# Altium PCB CH32V317W-R0-1v0.PcbDoc
Units mil, origin at the board's own origin, x right, y up, seen from the top; angles counter-clockwise.
Board outline 2362.2 x 2874.02 mil, 2 copper layers (Top Layer, Bottom Layer); 50 components, 79 nets, 297 pads, 416 vias.
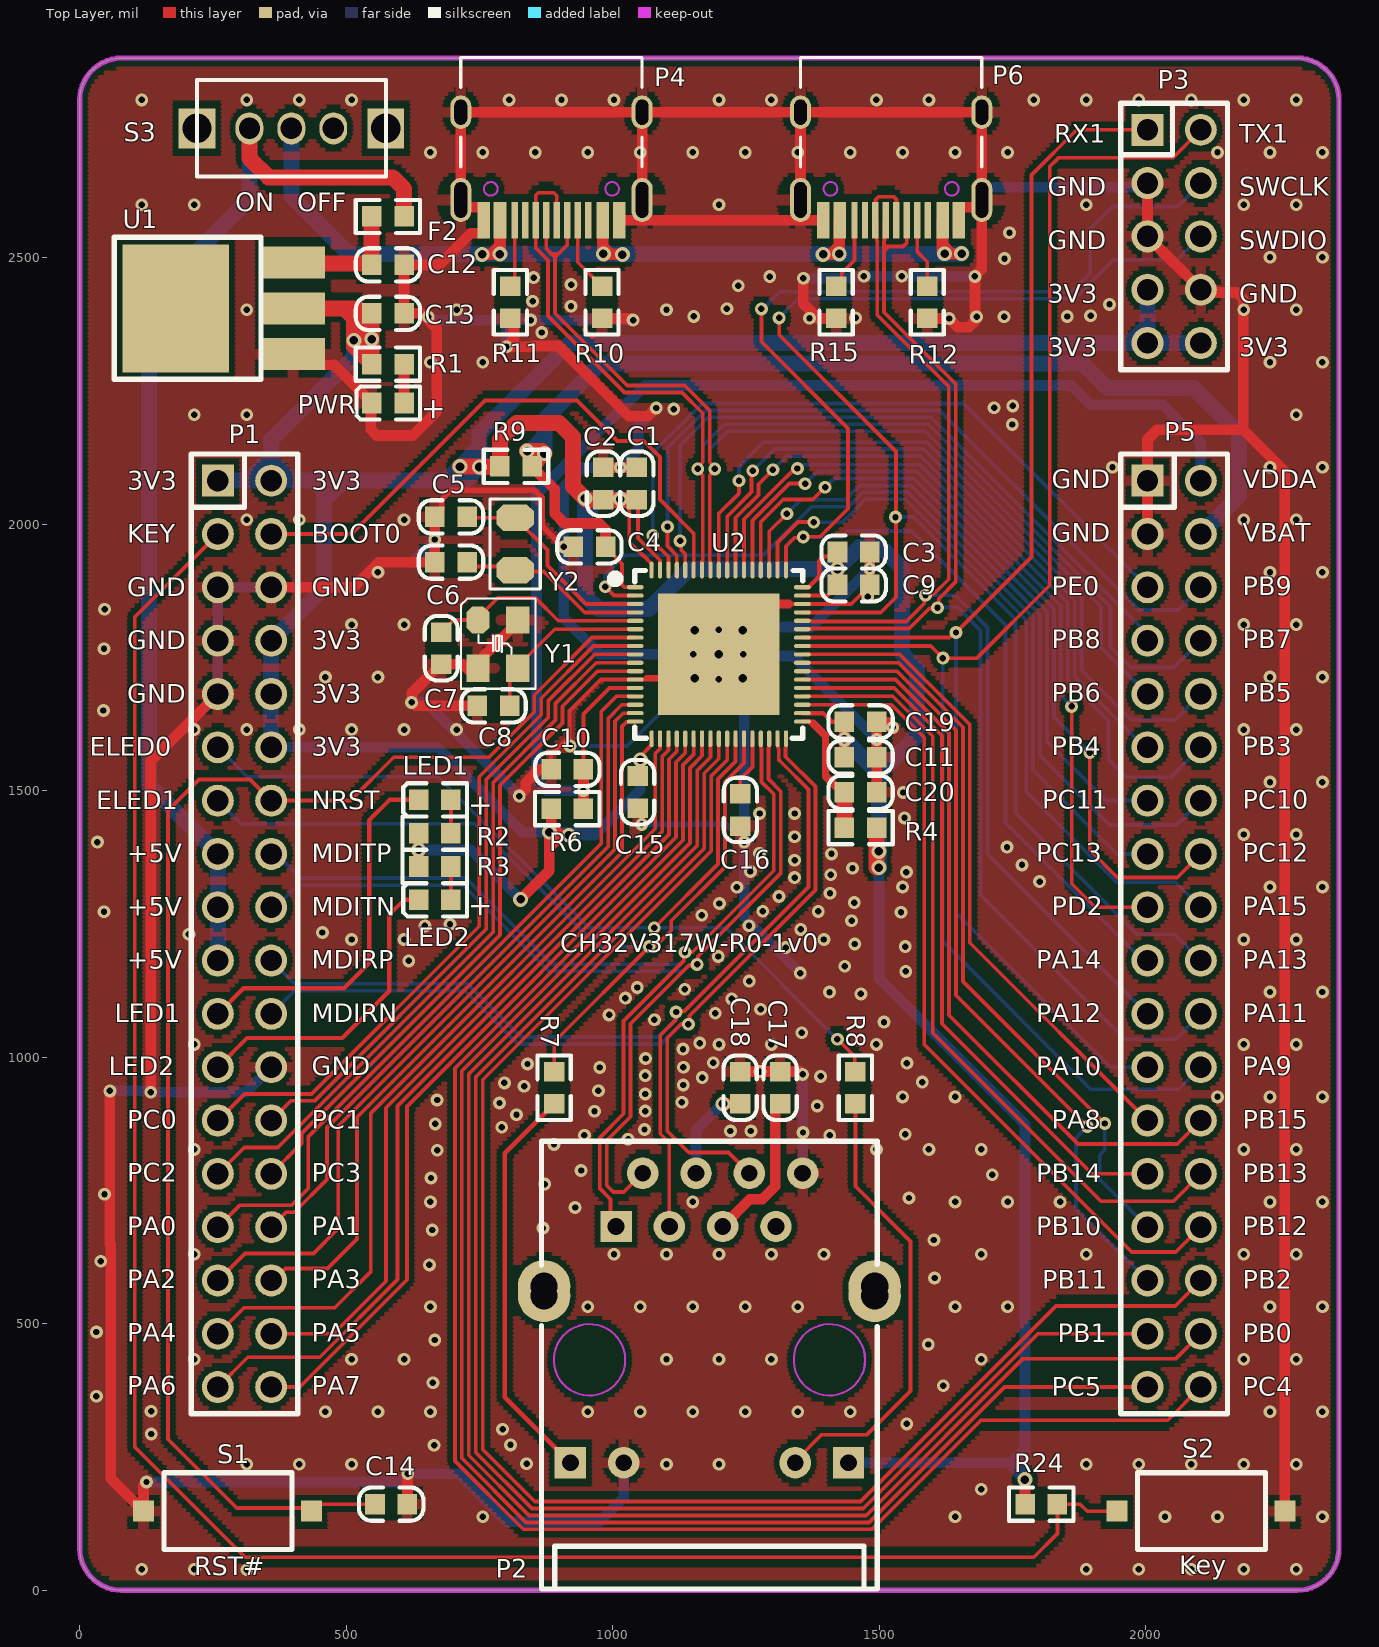
[diagram p0: Top Layer view]
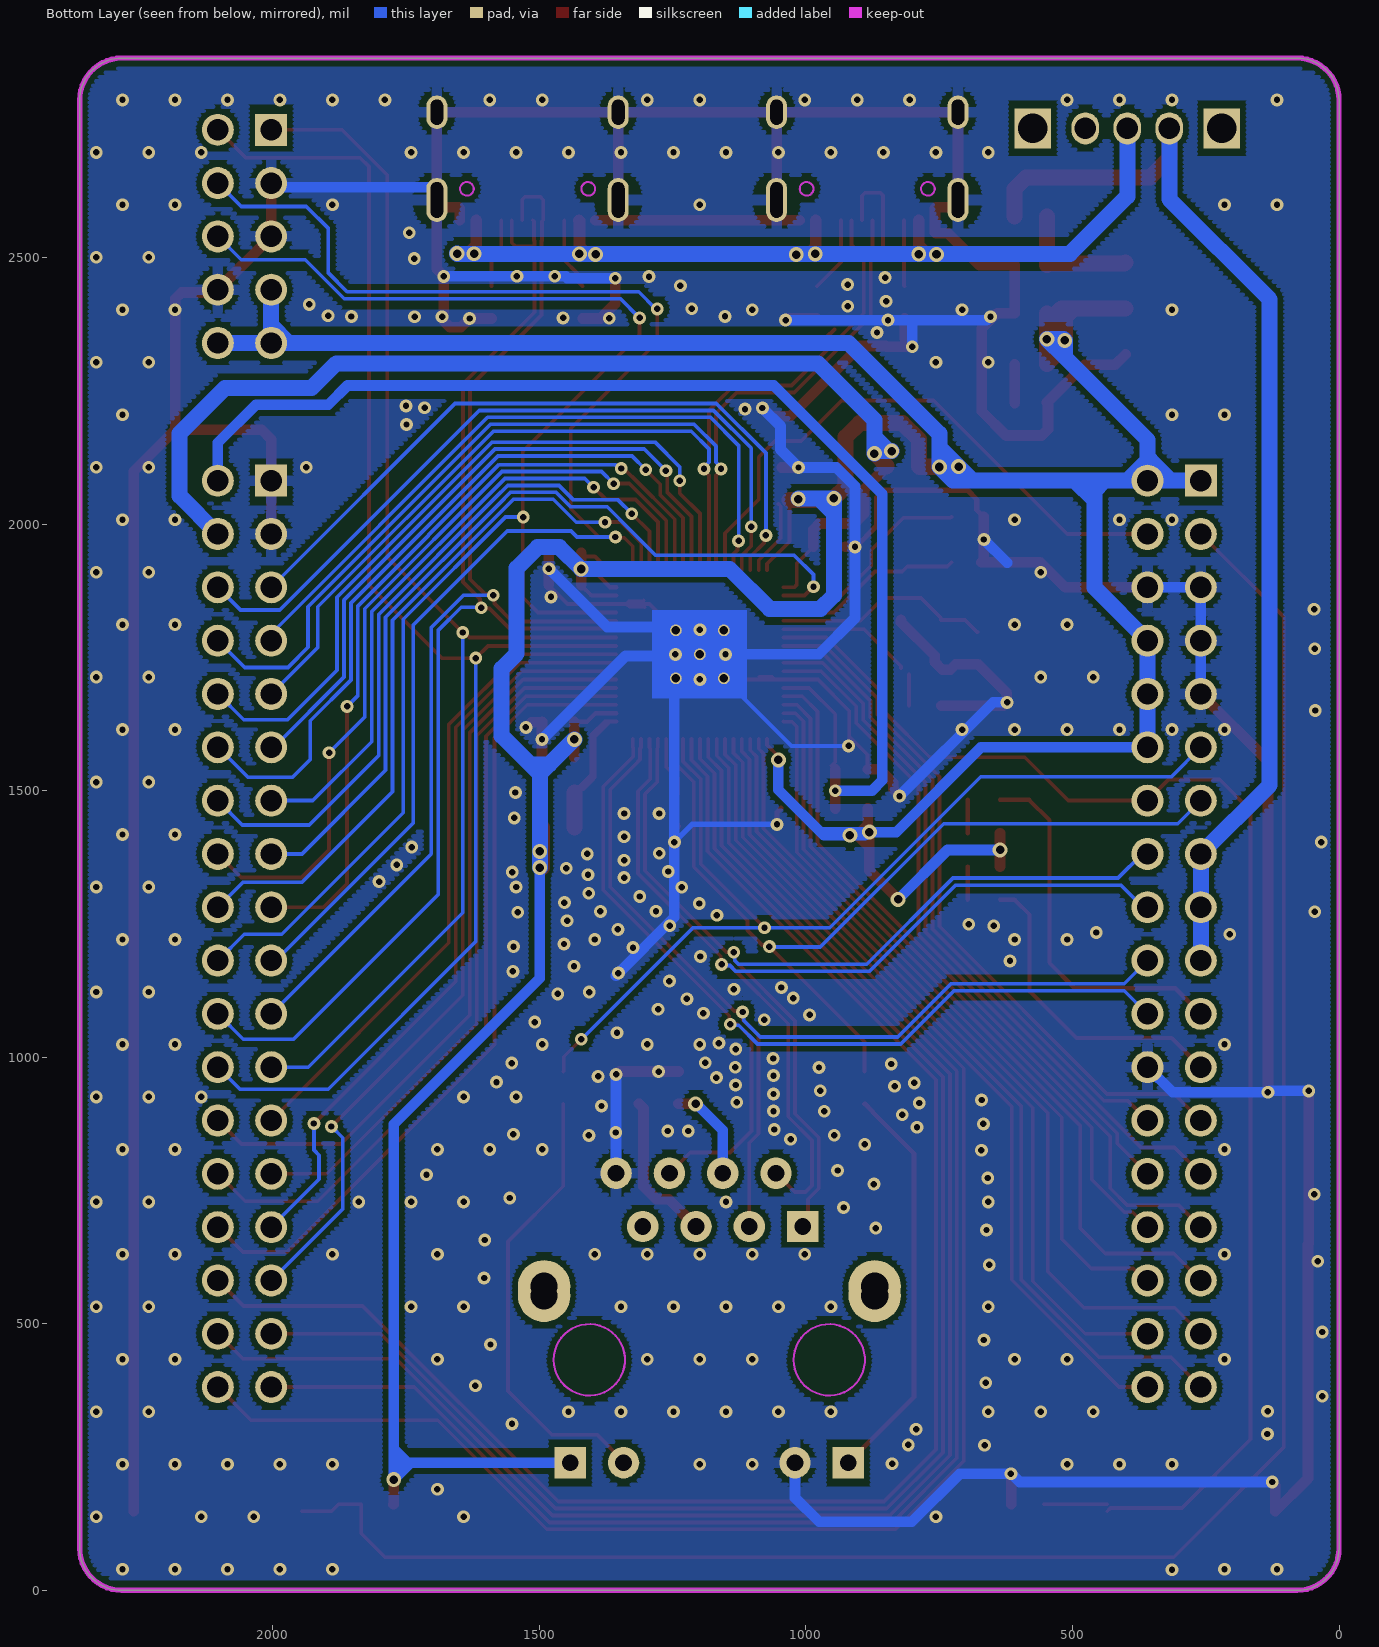
[diagram p1: Bottom Layer view, seen from below]

## Layer stack, top to bottom
Top Solder: solder mask 0.4, Solder Resist, Dk 3.5
Top Layer: signal copper 1.4
Dielectric 1: dielectric 12.6, FR-4, Dk 4.8
Bottom Layer: signal copper 1.4
Bottom Solder: solder mask 0.4, Solder Resist, Dk 3.5

## Board outline
0,78.74 0,2795.28 cw(c78.74,2795.28) 78.74,2874.02 2283.46,2874.02 cw(c2283.46,2795.28) 2362.2,2795.28 2362.2,78.74 cw(c2283.46,78.74) 2283.46,0 78.74,0 cw(c78.74,78.74)

## Design rules (kind name [scope] priority, off if disabled: settings)
Clearance Clearance_1 [InPolygon] p1: gap=10 ignorepadtopadclearanceinfootprint=FALSE
Clearance [All] p2: gap=6 ignorepadtopadclearanceinfootprint=FALSE except(8: Arc-Via Track-Via SMDPad-Via THPad-Via Via-Via Via-Fill Via-Poly Via-Region Via-Hole)
ComponentClearance [All] p1 off: gap=10 collisioncheckmode=3 verticalgap=10 showdistances=FALSE
DiffPairsRouting [All] p1: maxlimit=10 minlimit=6 mostfreqgap=8 toplayer_minwidth=6 toplayer_maxwidth=15 toplayer_prefwidth=8 bottomlayer_minwidth=6 bottomlayer_maxwidth=15 bottomlayer_prefwidth=8 maxuncoupledlength=500
MinimumSolderMaskSliver [All] p1 off: minsoldermaskwidth=10
PolygonConnect PolygonConnect_1 [IsVia] p1: connectstyle=Direct reliefconductorwidth=10 reliefentries=4 polygonreliefangle="90 Angle" airgapwidth=10
PolygonConnect [All] p2: connectstyle=Relief reliefconductorwidth=20 reliefentries=4 polygonreliefangle="90 Angle" airgapwidth=10
RoutingVias [All] p1: holewidth=16 width=28 viastyle="Through Hole" minholewidth=12 minwidth=24 maxholewidth=28 maxwidth=50
SilkToSilkClearance [All] p1 off: silktosilkclearance=10
SilkToSolderMaskClearance [IsPad] p1 off: minsilkscreentomaskgap=10 clearancetoexposedcopper=TRUE
SolderMaskExpansion [All] p1: expansion=2 istentingtop=FALSE
Width [All] p1: maxlimit=100 minlimit=6 preferedwidth=10
25 further rules are at their usual default settings.

## Classes and differential pairs
differential pair NewDifferentialPair2: +PA11 -PA12
differential pair NewDifferentialPair1: +PB6 -PB7
differential pair ERX: +"" -""
differential pair ETX: +"" -""
differential pair MDIR: +MDIRP -MDIRN
differential pair MDIT: +MDITN -MDITP

## Components (designator, comment, footprint, x,y, rotation, side; value= is the part's Value field where it differs from the comment)
C1 "0.1uF" 0603_C 1044.99,2106.11 r270 top
C2 "0.1uF" 0603_C 982.27,2106.11 r270 top
C3 "0.1uF" 0603_C 1482.08,1947.6 r180 top
C4 "0.1uF" 0603_C 925.79,1957.31 r0 top
C5 "12pF" 0603_C 726.8,2013.45 r180 top
C6 "12pF" 0603_C 726.8,1928.45 r180 top
C7 "20pF" 0603_C 678.22,1736.88 r90 top
C8 "20pF" 0603_C 745.9,1659.06 r0 top
C9 "0.1uF" 0603_C 1482.08,1885.78 r180 top
C10 "0.1uF" 0603_C 944.92,1539.82 r180 top
C11 "0.1uF" 0603_C 1495.07,1562.93 r180 top
C12 "10uF" 0603_C 547.87,2486.06 r0 top
C13 "10uF" 0603_C 547.87,2395.14 r0 top
C14 "0.1uF" 0603_C 614.6,161.68 r180 top
C15 "0.1uF" 0603_C 1046.72,1466.83 r90 top
C16 "1uF" 0603_C 1239.21,1433.53 r90 top
C17 "1uF" 0603_C 1313.83,973.07 r270 top
C18 "1uF" 0603_C 1238.83,973.07 r270 top
C19 "10uF" 0603_C 1495.07,1629.13 r180 top
C20 "1uF" 0603_C 1495.07,1496.72 r180 top
F2 "500mA" 0603 608.5,2576.98 r180 top
LED1 "LED1   blue" 0603+ 696.46,1482.71 r180 top
LED2 "LED2  blue" 0603+ 696.46,1295.1 r180 top
P1 "Header 18X2" IDC36-2.54mm 259.25,2081.28 r0 top
P2 "HR911105A" HR911105A 1006.09,682.44 r0 top
P3 "Header 5X2" IDC10-2.54mm 2002.95,2339.53 r0 top
P4 "USBHS" TYPE-C-Receptacle-2.0 884.91,2569.7 r180 top
P5 "Header 18X2" IDC36-2.54mm 2002.95,2081.28 r0 top
P6 "USBFS" TYPE-C-Receptacle-2.0 1522.07,2569.7 r180 top
PWR "POWER  red" 0603+ 608.5,2227.1 r180 top
R1 "1K" 0603 608.5,2299.99 r180 top
R2 "1K" 0603 635.83,1420.17 r0 top
R3 "1K" 0603 635.83,1357.63 r0 top
R4 "0Ω" 0603 1434.44,1430.51 r0 top
R6 "0R" 0603 884.29,1466.35 r0 top
R7 "470Ω" 0603 890.12,973.07 r270 top
R8 "470Ω" 0603 1455.05,973.07 r270 top
R9 "0R" 0603 788.17,2108.14 r0 top
R10 "NC(5.1K)" 0603 979.83,2385.62 r90 top
R11 "NC(5.1K)" 0603 807.83,2385.62 r90 top
R12 "NC(5.1K)" 0603 1589.83,2385.62 r90 top
R15 "NC(5.1K)" 0603 1418.83,2385.62 r90 top
R24 "10K" 0603 1834.01,161.68 r180 top
S1 "RST#" SMD_6.1x3.65x2.5mm-KEY 119.76,148.48 r0 top
S2 "Key" SMD_6.1x3.65x2.5mm-KEY 1945.59,148.48 r0 top
S3 "SW" SW1 397.16,2742.12 r180 top
U1 "1117-3.3V" SOT-223 400.12,2318.71 r90 top
U2 "CH32V317W" QFN68_8X8 1198.84,1755.57 r270 top
Y1 "8M" XT3225 746.85,1820.05 r270 top
Y2 "32.768k" FC-135 816.8,2011.87 r270 top

## Footprints (in the part's own frame and the unit in brackets; to place one, negate y for a bottom-side part, rotate by r counter-clockwise, add the part's x,y. Pads: shape width x height; smd on the part's side, far side on the other; paste and mask are expansions set on the pad)
0603 [mm]
  rect 0.93x0.98 smd: 1(0,0) 2(1.54,0)
  silkscreen extent -0.76,-0.79 2.3,0.79
0603+ [mm]
  rect 0.93x0.98 smd: 1(0,0) 2(1.54,0)
  silkscreen extent -0.76,-0.79 2.27,0.79
0603_C [mm]
  rect 0.93x0.98 smd mask+0.051: 1(0,0) 2(1.54,0)
  silkscreen extent -0.76,-0.79 2.31,0.79
FC-135 [mil]
  oct 50x70 smd: 1(0,0) 2(98.43,0)
  silkscreen extent -35,-47 133,47
HR911105A [mm]
  rect 1.5x1.5 hole 0.8: 1(0,0) 9(-2.175,-11.252) 12(11.075,-11.252)
  round 1.5 hole 0.8: 2(1.27,2.54) 3(2.54,0) 4(3.81,2.54) 5(5.08,0) 6(6.35,2.54) 7(7.62,0) 8(8.89,2.54) 10(0.365,-11.252) 11(8.535,-11.252)
  round 2.5 hole 1.3: ""(-3.43,-2.852) ""(-3.43,-3.3) ""(12.32,-3.3) ""(12.32,-2.852)
  Keep-Out Layer circle w0.1: c-1.265,-6.352 r1.7
  Keep-Out Layer circle w0.1: c10.165,-6.352 r1.7
  silkscreen extent -3.55,-17.27 12.45,4.06
IDC10-2.54mm [mil]
  rect 60x60 hole 40: 1(0,400)
  round 60 hole 40: 2(100,400) 3(0,300) 4(100,300) 5(0,200) 6(100,200) 7(0,100) 8(100,100) 9(0,0) 10(100,0)
  silkscreen extent -50,-50 150,450
IDC36-2.54mm [mil]
  rect 60x60 hole 40: 1(0,0)
  round 60 hole 40: 2(100,0) 3(0,-100) 4(100,-100) 5(0,-200) 6(100,-200) 7(0,-300) 8(100,-300) 9(0,-400) 10(100,-400) 11(0,-500) 12(100,-500) 13(0,-600) 14(100,-600) 15(0,-700) 16(100,-700) 17(0,-800) 18(100,-800) 19(0,-900) 20(100,-900) 21(0,-1000) 22(100,-1000) 23(0,-1100) 24(100,-1100) 25(0,-1200) 26(100,-1200) 27(0,-1300) 28(100,-1300) 29(0,-1400) 30(100,-1400) 31(0,-1500) 32(100,-1500) 33(0,-1600) 34(100,-1600) 35(0,-1700) 36(100,-1700)
  silkscreen extent -50,-1750 150,50
QFN68_8X8 [mm]
  round 0.559 hole 0.406: 0(-1.143,1.143) 0(-1.143,-1.143) 0(0,0) 0(1.143,1.143) 0(1.143,-1.143)
  rect 5.8x5.8 smd mask+0.051: 0(0,0)
  oval 0.2x0.8 smd mask+0.051: 1(-3.2,-3.982) 2(-2.8,-3.982) 3(-2.4,-3.982) 4(-2,-3.982) 5(-1.6,-3.982) 6(-1.2,-3.982) 7(-0.8,-3.982) 8(-0.4,-3.982) 9(0,-3.982) 10(0.4,-3.982) 11(0.8,-3.982) 12(1.2,-3.982) 13(1.6,-3.982) 14(2,-3.982) 15(2.4,-3.982) 16(2.8,-3.982) 17(3.2,-3.982) 35(3.2,3.982) 36(2.8,3.982) 37(2.4,3.982) 38(2,3.982) 39(1.6,3.982) 40(1.2,3.982) 41(0.8,3.982) 42(0.4,3.982) 43(0,3.982) 44(-0.4,3.982) 45(-0.8,3.982) 46(-1.2,3.982) 47(-1.6,3.982) 48(-2,3.982) 49(-2.4,3.982) 50(-2.8,3.982) 51(-3.2,3.982)
  oval 0.8x0.2 smd mask+0.051: 18(4.018,-3.2) 19(4.018,-2.8) 20(4.018,-2.4) 21(4.018,-2) 22(4.018,-1.6) 23(4.018,-1.2) 24(4.018,-0.8) 25(4.018,-0.4) 26(4.018,0) 27(4.018,0.4) 28(4.018,0.8) 29(4.018,1.2) 30(4.018,1.6) 31(4.018,2) 32(4.018,2.4) 33(4.018,2.8) 34(4.018,3.2) 52(-4.018,3.2) 53(-4.018,2.8) 54(-4.018,2.4) 55(-4.018,2) 56(-4.018,1.6) 57(-4.018,1.2) 58(-4.018,0.8) 59(-4.018,0.4) 60(-4.018,0) 61(-4.018,-0.4) 62(-4.018,-0.8) 63(-4.018,-1.2) 64(-4.018,-1.6) 65(-4.018,-2) 66(-4.018,-2.4) 67(-4.018,-2.8) 68(-4.018,-3.2)
  silkscreen extent -4,-5.13 4,4
SMD_6.1x3.65x2.5mm-KEY [mm]
  rect 1x1 smd: 1(0,0) 2(8,0)
  silkscreen extent 0.98,-1.83 7.08,1.83
SOT-223 [mil]
  rect 60x120 smd: 1(0,0) 2(86,0) 3(172,0)
  rect 240x200 smd: ""(86,220)
  silkscreen extent -47,60 219,335
SW1 [mm]
  rect 1.75x1.9 hole 1.4: 0(-4.5,0) 0(4.5,0)
  oval 1.321x1.524 hole 1.016: 1(0,0) 2(-2,0) 3(2,0)
  silkscreen extent -4.51,-2.31 4.5,2.29
TYPE-C-Receptacle-2.0 [mm]
  oval 1x2.1 hole 0.6 slot 1.7 at 90 deg: 0(-4.32,-0.97) 0(4.32,-0.97)
  oval 1x1.6 hole 0.6 slot 1.2 at 90 deg: 0(-4.32,-5.15) 0(4.32,-5.15)
  rect 0.6x1.75 smd mask+0.051: A1(-3.225,0) A4(-2.45,0) B1(3.225,0) B4(2.45,0)
  rect 0.3x1.75 smd mask+0.051: A5(-1.25,0) A6(-0.25,0) A7(0.25,0) A8(1.25,0) B5(1.75,0) B6(0.75,0) B7(-0.75,0) B8(-1.75,0)
  Keep-Out Layer circle w0.1: c2.89,-1.5 r0.325
  Keep-Out Layer circle w0.1: c-2.89,-1.5 r0.325
  silkscreen extent -4.32,-7.75 4.32,-2.55
XT3225 [mm]
  oct 1.3x1.1 smd: 1(0,0)
  rect 1.3x1.1 smd: 2(2.3,0) 3(2.3,1.9) 4(0,1.9)
  silkscreen extent -1.02,-0.8 3.27,2.74

## Part data
C1 C2 C3 C4 C9 C10 C11 C12 C13 C14 C15 C16 C17 C18 C19 C20: library part CAP, "Capacitor"
C5 C6 C7 C8: library part Cap, "Capacitor"
F2: library part FUSE1, "Fuse"
LED1 LED2 PWR: library part LED0, "Typical INFRARED GaAs LED", LatestRevisionDate=08-Jul-2005, LatestRevisionNote="Mech Layer 1 removed.", PackageReference=LED-0, Published=8-Jun-2000, Publisher="Altium Limited"
P1 P5: "Header, 18-Pin, Dual row", LatestRevisionDate=17-Jul-2002, LatestRevisionNote="Re-released for DXP Platform.", Publisher="Altium Limited"
P3: "Header, 5-Pin, Dual row", LatestRevisionDate=17-Jul-2002, LatestRevisionNote="Re-released for DXP Platform.", Publisher="Altium Limited"
P4 P6: library part TYPE-C1
R1 R2 R3: library part "Res Semi", "Semiconductor Resistor"
R4 R7 R8: library part RES
R6 R9: library part R
R10 R11 R12 R15 R24: library part Res2, "Resistor"
S1 S2: library part KEY1
U2: "RISC-V FPU HD-MCU, 144MHz, USB_480M, USB OTG, 100M Ethernet & Phy, 2*CAN"
Y1 Y2: library part XTAL, "Crystal Oscillator", LatestRevisionDate=17-Jul-2002, LatestRevisionNote="Re-released for DXP Platform.", PackageReference=R38, Published=8-Jun-2000, Publisher="Altium Limited"

## Via types
v1: diameter 24, hole 12, Top Layer to Bottom Layer, tented both sides, 389 vias
v2: diameter 28, hole 16, Top Layer to Bottom Layer, tented both sides, 27 vias

## Nets (pads, with @x,y where several pads share a name; then routed paths per layer and width w, separated by ;. In a path a pad name is that pad's centre, name@x,y a point inside that pad or via, vN(x,y) a via of type N, cw(c..) or ccw(c..) an arc to the next point about the centre after c; other vN are vias at no path point)
3V3: C1.2 C2.2 C3.2 C9.2 C11.2 C13.1 C15.2 C19.2 P1.1 P1.2 P1.8 P1.10 P1.12 P2.12 P3.7 P3.9 P3.10 R1.2 R2.1 R3.1 R4.2 R6.1 R9.1 R24.2 U1.2 U2.18 U2.36 U2.50 U2.51 U2.67 U2.68 | length 10203.1
  Top Layer w7: C1.2@1030.71,2045.48 1030.71,1966.68 1057.37,1940.02 1058.4,1940.02 1072.86,1925.56 U2.68 ; C1.2@1051.35,2037.62 1047.08,2033.34 1047.08,1973.46 1088.61,1931.93 U2.67 ; v2(1051.72,1557.58) 1051.72,1564.44 1072.86,1585.57 U2.18
  Top Layer w8: U2.36 1394.25,1645.33 1410.45,1629.13 C19.2 ; U2.50 1402.46,1865.8 1421.45,1884.79 C9.2 ; U2.51 1367.31,1881.55 1387.26,1901.5 1387.26,1930.76 1395.83,1939.33 1414.18,1939.33 1421.45,1946.6 C3.2@1421.45,1945.62
  Top Layer w20: R3.1 v2(635.83,1388.74) R2.1 ; v2(826.98,1296.11) 881.11,1350.23 881.11,1394.11 ; v2@881.11,1416.25 903.25,1416.25 ; R6.1 v2@884.29,1435.21 ; v2(917.34,1416.25) 903.25,1416.25 ; C9.2 v2(1421.45,1915.7) C3.2@1421.45,1945.62 ; C11.2 v2(1434.44,1596.03) C19.2 ; v2(1773.01,207.79) 1773.2,207.6 1773.2,161.86 R24.2 ; 881.11,1394.11 903.25,1416.25 ; 881.11,1394.11 v2(881.11,1422.14) 881.11,1424.3 884.29,1427.49 v2@884.29,1435.21 ; v2@884.29,1435.21 903.25,1416.25
  Top Layer w30: U1.2 496.33,2404.71 ; R1.2 R1.2@547.87,2300.97 ; C13.1 C13.1@547.87,2377.85 ; v2(713.39,2107.66) 713.87,2108.14 R9.1 ; v2(749.72,2107.03) 787.07,2107.03 R9.1 ; C1.2@1030.71,2045.48 C2.2 950.42,2045.48 v2(947.65,2048.25) 925.72,2070.17 925.72,2162.93 899.17,2189.49 819,2189.49 788.17,2158.67 R9.1 ; v2@1495.07,1355.59 R4.2 ; 496.33,2404.71 521,2404.71 C13.1@547.87,2377.85 ; 496.33,2404.71 514.45,2386.59 ; v2(514.45,2344.69) 514.45,2334.39 R1.2@547.87,2300.97 ; v2(514.45,2344.69) 514.45,2386.59 ; v2(514.45,2344.69) 516.48,2346.72 531.89,2346.72 ; 514.45,2386.59 531.89,2369.15 531.89,2346.72 ; 531.89,2346.72 547.87,2362.7 ; 531.89,2346.72 v2(547.87,2346.72) ; R1.2@547.87,2300.97 v2(547.87,2346.72) ; v2(547.87,2346.72) 547.87,2362.7 ; 547.87,2362.7 C13.1@547.87,2377.85
  Bottom Layer w20: P1.12 671.61,1581.28 830.75,1422.14 v2(881.11,1422.14) v2@883.27,1422.14 ; v2(635.83,1388.74) 734.35,1388.74 v2(826.98,1296.11) ; v2@947.6,2047.12 v2@947.65,2047.08 ; v2(947.65,2048.25) v2@948.41,2047.48 ; 974.26,2046.71 v2(1014.37,2046.71) v2@1013.61,2047.48 ; v2(1051.72,1557.58) 1051.72,1501.93 971.93,1422.14 ; P2.12 1741.35,239.45 ; v2(1499.2,1355.59) 1499.2,1148.05 1773.01,874.24 1773.01,265.11 ; v2@883.27,1422.14 971.93,1422.14 ; v2@883.27,1422.14 889.16,1416.25 v2(917.34,1416.25) 966.04,1416.25 971.93,1422.14 ; 1741.35,239.45 1757.18,223.62 ; 1741.35,239.45 1747.35,239.45 1760.18,252.28 ; 1757.18,223.62 1760.18,226.62 1760.18,252.28 ; 1757.18,223.62 v2(1773.01,207.79) 1773.01,265.11 ; 1760.18,252.28 1773.01,265.11
  Bottom Layer w30: P1.1 315.45,2081.28 ; P1.12 P1.10 P1.8 458.51,1880.54 458.51,2044.41 ; v2@947.65,2047.08 947.65,2020.1 ; v2@948.41,2047.48 v2@1013.61,2047.48 ; 974.26,2046.71 947.65,2020.1 ; v2(1434.44,1596.03) 1481.39,1549.08 ; v2(1499.2,1355.59) v2(1499.2,1386.12) 1499.2,1531.27 ; P3.7 2002.95,2372.85 ; P3.10 P3.9 ; 315.45,2081.28 353.87,2119.69 359.25,2119.69 ; 315.45,2081.28 P1.2 ; P1.2 397.67,2081.28 ; P1.2 359.25,2119.69 ; 359.25,2119.69 397.67,2081.28 ; 359.25,2119.69 359.25,2158.11 514.45,2313.31 ; 397.67,2081.28 439.95,2081.28 ; 439.95,2081.28 458.51,2081.28 ; 439.95,2081.28 458.51,2062.72 ; 458.51,2044.41 458.51,2062.72 ; 458.51,2044.41 495.38,2081.28 ; 458.51,2062.72 458.51,2081.28 ; 458.51,2081.28 495.38,2081.28 ; 495.38,2081.28 687.01,2081.28 ; 514.45,2313.31 v2(547.87,2346.72) 516.48,2346.72 v2(514.45,2344.69) 514.45,2313.31 ; 687.01,2081.28 723.96,2081.28 v2(749.72,2107.03) ; 687.01,2081.28 v2(713.39,2107.66) ; v2(713.39,2107.66) 749.72,2143.98 ; v2(713.39,2107.66) 749.09,2107.66 v2(749.72,2107.03) ; v2(749.72,2107.03) 749.72,2143.98 ; 749.72,2143.98 749.72,2169.54 919.71,2339.53 1969.64,2339.53 ; 947.65,2020.1 947.65,1865.99 972.74,1840.9 1068.21,1840.9 1143.01,1915.7 v2(1421.45,1915.7) 1462.33,1956.58 1503.23,1956.58 1542.63,1917.18 1542.63,1757.07 1570.78,1728.92 1570.78,1602.85 1517.01,1549.08 ; 1481.39,1549.08 1499.2,1531.27 ; 1481.39,1549.08 1517.01,1549.08 ; 1499.2,1531.27 1517.01,1549.08 ; 1969.64,2339.53 2002.95,2372.85 ; 1969.64,2339.53 P3.9 ; P3.9 2002.95,2372.85
5V: P4.A4 P4.B4 P6.A4 P6.B4 S3.1 | length 1916.5
  Top Layer w22: v2(755.03,2505.78) 755.27,2506.01 771.68,2506.01 ; 788.4,2526.17 788.4,2522.73 ; P4.B4 788.4,2569.64 788.4,2522.73 ; P4.A4 v2@981.37,2520.23 ; 1000.28,2506.21 v2@995.4,2506.21 ; v2(1018.15,2505.5) 1017.44,2506.21 v2@995.4,2506.21 ; v2(1394.37,2505.84) 1394.75,2506.21 1409.57,2506.21 ; P6.B4 1424.8,2568.89 1424.8,2534.03 1424.76,2533.98 1424.76,2521.4 ; P6.A4 1618.53,2522.82 ; 1637.88,2507.11 v2@1634.24,2507.11 ; v2(1654.32,2507.23) 1654.2,2507.11 v2@1634.24,2507.11 ; 771.68,2506.01 788.4,2522.73 ; 771.68,2506.01 788.1,2506.01 v2(788.34,2506.25) 788.4,2506.31 788.4,2522.73 ; v2@981.37,2520.23 981.37,2508.5 982.42,2507.46 v2(982.42,2506.92) 983.13,2506.21 v2@995.4,2506.21 ; v2@981.37,2520.23 v2@995.4,2506.21 ; 1409.57,2506.21 1424.39,2506.21 v2(1424.76,2506.58) 1424.76,2521.4 ; 1409.57,2506.21 1424.76,2521.4 ; 1618.53,2522.82 1618.53,2511.5 1622.5,2507.53 v2(1622.5,2506.99) 1622.62,2507.11 v2@1634.24,2507.11 ; 1618.53,2522.82 v2@1634.24,2507.11
  Bottom Layer w30: S3.1 397.16,2614.51 505.09,2506.58 v2(1424.76,2506.58) v2@1622.09,2506.58 ; v2(1622.5,2506.99) v2@1622.09,2506.58 ; v2(1654.32,2507.23) 1653.67,2506.58 v2@1622.09,2506.58
+5V: F2.1 P1.15 P1.17 P1.19 S3.3 | length 2113.8
  Top Layer w30: S3.3 318.42,2686.45 354.63,2650.25 587.05,2650.25 608.5,2628.8 F2.1
  Bottom Layer w30: P1.19 P1.17 P1.15 130.12,1510.41 130.12,2421.29 318.42,2609.59 S3.3
BOOT0: P1.4 U2.63 | length 1114.7
  Top Layer w7: P1.4 509.74,1981.28 760.09,2231.63 932.89,2231.63 1008.86,2155.67 1058.21,2155.67 1088.35,2125.53 1088.35,2045.96 1151.6,1982.71 U2.63
ELED0: P1.11 R8.1 U2.28 | length 1881.4
  Top Layer w7: v1(1077.75,1242.7) 1197.42,1362.36 1197.42,1521.78 1230.34,1554.7 U2.28 ; v1(1421.24,1033.81) 1454.07,1000.99 1454.07,974.06 R8.1
  Bottom Layer w7: P1.11 314.39,1526.14 671.85,1526.14 955.3,1242.7 v1(1077.75,1242.7) 1211.9,1242.7 1420.79,1033.81 v1(1421.24,1033.81)
ELED1: P1.13 R7.1 U2.29 | length 1702.6
  Top Layer w7: R7.1 890.12,1029.08 1071.7,1210.65 1082.33,1210.65 1109.56,1237.88 1109.56,1256.12 1210.42,1356.98 1210.42,1516.4 1246.09,1552.06 U2.29
  Bottom Layer w7: P1.13 302.54,1437.99 741.62,1437.99 973.09,1206.52 1067.57,1206.52 v1(1068.44,1207.4) v1@1069.32,1206.52
GND: C1.1 C2.1 C3.1 C4.1 C5.2 C6.2 C7.1 C8.1 C9.1 C10.2 C11.1 C12.2 C13.2 C14.1 C15.1 C16.1 C17.1 C18.1 C19.1 C20.1 P1.5 P1.6 P1.7 P1.9 P1.24 P2.8 P2.10 P3.3 P3.5 P3.8 P4.0 P4.A1 P4.B1 P5.1 P5.3 P6.0 P6.A1 P6.B1 PWR.2 R10.1 R11.1 R12.1 R15.1 S1.1 S2.2 U1.1 U2.0 U2.12 U2.49 Y1.2 Y1.4 | length 17240.3
  Top Layer w7: C10.2 884.29,1567.2 918.61,1601.52 ; v1(919.86,1583.89) 918.61,1585.14 918.61,1601.52 ; U2.0@1087.5,1713.28 1063.1,1713.28 1058.31,1708.49 1042.23,1708.49 U2.12 ; U2.0@1302.77,1844.01 1303.56,1844.8 1331.42,1844.8 1336.69,1850.06 ; U2.0@1304.3,1856.55 1305.92,1854.93 1331.89,1854.93 1336.76,1850.06 ; C9.1 1482.08,1884.79 1447.35,1850.06 U2.49 1336.76,1850.06 ; 918.61,1601.52 918.61,1649.5 977.43,1708.32 U2.12 ; U2.12 1151.6,1708.32 1153.82,1710.55 1198.84,1755.57 1243.86,1800.58 1293.33,1850.06 1336.69,1850.06 ; 1336.69,1850.06 1336.76,1850.06
  Top Layer w8: 946.54,2365.13 960.88,2350.8 962.08,2350.8
  Top Layer w10: C5.2 679.48,2026.75 679.48,2045.97 697.03,2063.52 853.27,2063.52 867.6,2049.19 867.6,1996.03 906.54,1957.08 v1(907.9,1957.08) ; C15.1 1054.2,1459.35 v1(1054.2,1436.71) ; C16.1 1246.69,1426.05 v1(1246.69,1403.41)
  Top Layer w20: v1(56.65,936.77) 56.65,649.79 58.29,648.14 58.29,209.95 S1.1 119.76,196.61 125.32,202.17 v1(125.32,203.25) ; v1(133.39,934.15) 133.39,1555.42 P1.9 ; P1.6 513.87,1881.28 561.04,1928.45 C6.2 ; U1.1 420.12,2298.71 477.24,2298.71 547.87,2228.08 PWR.2 545.82,2225.05 545.82,2177.83 557.54,2166.12 624.54,2166.12 670.1,2211.69 670.1,2366.44 641.4,2395.14 C13.2 C12.2 674.3,2486.06 733.6,2545.36 756.13,2545.36 757.94,2547.17 757.94,2592.34 756.13,2594.15 723.78,2594.15 714.83,2603.1 714.83,2607.89 714.83,2772.46 P4.0@1054.99,2772.46 ; C14.1 615.08,162.16 615.08,218.3 v1(615.56,218.78) ; C5.2 v1(666.17,1970.95) C6.2 ; C6.2@671.17,1928.45 C6.2 ; C8.1 630.13,1659.06 623.67,1665.52 v1(622.59,1665.52) 623.35,1666.28 623.35,1683 677.23,1736.88 719.07,1736.88 729.4,1726.54 743.9,1726.54 Y1.2 758.51,1741.15 758.51,1752.96 821.66,1816.11 Y1.4 ; v1(800.69,2332.45) 800.69,2333.53 814.83,2347.67 R11.1@814.83,2385.62 ; v1@802,2333.75 802,2332.99 802.54,2332.45 849.14,2332.45 850.73,2334.03 898.09,2334.03 1029.63,2202.49 1065.38,2202.49 1080.55,2217.66 v1(1081.63,2217.66) ; v1(824.41,1489.82) 824.41,1490.9 836.46,1502.95 836.46,1514.63 861.66,1539.82 C10.2 ; v1(907.9,1957.08) 908.02,1957.2 925.68,1957.2 C4.1 ; R10.1 1033.88,2385.62 1036.95,2382.56 v1(1038.03,2382.56) ; C2.1 v1(1013.89,2106.11) C1.1 ; P4.A1 P6.B1 ; P4.0@1054.99,2607.89 P4.0@1054.99,2772.46 ; C18.1 C17.1 1350.72,973.07 v1(1356.09,967.7) ; P6.0@1351.99,2607.89 P6.0@1351.99,2772.46 ; v1(1357.42,2461.21) 1357.42,2413.75 1385.54,2385.62 R15.1 ; C9.1 C3.1 ; C20.1 C11.1 v1(1495.07,1596.03) C19.1 1496.17,1628.03 1514.72,1628.03 1524.1,1618.65 v1(1525.18,1618.65) ; R12.1 v1(1630.82,2385.62) 1647.26,2369.18 1667.53,2369.18 1679.24,2380.89 v1(1679.24,2464.49) 1679.24,2465.57 1692.15,2478.48 P6.0@1692.15,2603.1 ; P6.A1 1649.04,2592.34 1650.85,2594.15 1683.2,2594.15 P6.0@1692.15,2603.1 ; P5.3 P5.1 2002.95,2158.74 2020.87,2176.65 2182.66,2176.65 ; P3.3 P3.5 2108.19,2434.29 2170.95,2434.29 2182.66,2422.58 2182.66,2176.65 ; S2.2 2260.55,2098.76 2182.66,2176.65 ; P4.0@1054.99,2772.46 P6.0@1351.99,2772.46 ; P6.0@1351.99,2772.46 1692.15,2772.46 1692.15,2607.89 P6.0@1692.15,2603.1
  Bottom Layer w7: v1(919.86,1583.89) 1027.16,1583.89 U2.0@1153.82,1710.55
  Bottom Layer w10: v1(1054.2,1436.71) 1213.39,1436.71 v1(1246.69,1403.41)
  Bottom Layer w20: v1(56.65,936.77) 129.7,936.77 132.31,934.15 v1(133.39,934.15) 312.13,934.15 P1.24 ; v1(125.32,203.25) 598.95,203.25 614.48,218.78 v1(615.56,218.78) 711.09,218.78 801.48,128.39 975.08,128.39 1020.46,173.77 P2.10 ; P1.9 P1.7 P1.5 P1.6 ; v1(622.59,1665.52) 648.72,1665.52 v1(824.41,1489.82) ; 622.59,1927.36 v1(666.17,1970.95) ; v1(653.78,2389.03) 654.86,2389.03 661.33,2382.56 800.69,2382.56 ; v1(800.69,2332.45) 800.69,2382.56 ; v1(1038.03,2382.56) 800.69,2382.56 ; v1(1081.63,2217.66) 1047.76,2183.79 1047.76,2139.98 v1(1013.89,2106.11) 943.15,2106.11 907.9,2070.86 v1(907.9,1957.08) 907.9,1823.75 976.08,1755.57 v1(1150.84,1755.57) ; U2.0@1198.84,1755.57 1243.86,1710.55 1246.69,1707.72 v1(1246.69,1403.41) 1246.69,1262.36 v1@1356.09,1152.96 ; 1230.01,1752.67 1338.42,1752.67 v1(1495.07,1596.03) ; 1233.68,1806.92 1372.51,1806.92 1481.72,1916.13 v1(1482.08,1916.13) ; P2.8 v1(1356.09,967.7) ; v1(1357.42,2461.21) 1447.37,2461.21 1450.65,2464.49 v1(1679.24,2464.49) ; P6.0@1692.15,2607.89 1692.15,2622.93 1701.1,2631.88 1995.3,2631.88 P3.3
  other v1: 313.31,38.68 116.46,39.68 214.89,39.68 1888.11,39.68 1986.54,39.68 2084.96,39.68 2183.39,39.68 2281.82,39.68 756.22,138.11 1642.05,138.11 2035.75,138.11 2134.18,138.11 2331.03,138.11 1691.26,189.45 313.31,236.53 411.74,236.53 510.16,236.53 1100.71,236.53 1199.14,236.53 1888.11,236.53 1986.54,236.53 2084.96,236.53 2183.39,236.53 2281.82,236.53 838.29,237.5 664.85,272.01 808.14,272.88 134.46,293.24 793.29,302.15 1551.18,312.28 460.95,334.96 559.37,334.96 657.8,334.96 953.08,334.96 1051.5,334.96 1149.93,334.96 1248.35,334.96 1346.78,334.96 1445.2,334.96 2232.6,334.96 2331.03,334.96 134.09,335.75 31.46,364.2 1619.9,383.84 662.66,389.53 214.89,433.38 510.16,433.38 608.59,433.38 1100.71,433.38 1199.14,433.38 1297.56,433.38 1691.26,433.38 2183.39,433.38 2281.82,433.38 1591.56,461.07 666.16,469.48 31.46,484.52 657.8,531.81 953.08,531.81 1051.5,531.81 1149.93,531.81 1248.35,531.81 1346.78,531.81 1642.05,531.81 1740.48,531.81 2232.6,531.81 2331.03,531.81 1603.61,585.77 656.08,610.48 39.76,617.28 214.89,630.23 1002.29,630.23 1100.71,630.23 1199.14,630.23 1297.56,630.23 1395.99,630.23 1691.26,630.23 1888.11,630.23 2183.39,630.23 2281.82,630.23 1602.33,657.08 661.24,675.85 868.91,679.46 929.32,718.1 657.8,728.66 1149.93,728.66 1642.05,728.66 1740.48,728.66 1838.9,728.66 2232.6,728.66 2331.03,728.66 1555.54,735.82 46.67,743.13 872.54,762 658.94,773.33 1711.6,779.45 940.47,787.48 670.87,825.38 214.89,827.08 1494.41,827.08 1592.84,827.08 1691.26,827.08 2183.39,827.08 2281.82,827.08 889.77,836.37 1028.78,846.02 946.67,853.76 1406.99,853.37 1548.7,855.63 1356.67,858.69 1220.5,861.65 1258.98,861.65 1059.41,864.44 791.7,868.55 667.1,874.89 819.31,891.88 965.76,898.56 1060.79,898.98 1383.31,908.43 787.42,914.05 1129.64,915.48 670.4,919.68 1543.63,925.51 1642.05,925.51 2134.18,925.51 2232.6,925.51 2331.03,925.51 1060.79,930.98 972.95,937.06 833.7,945.55 1131.96,947.85 796.75,951.78 1580.32,953.33 1167.8,961.78 1389.82,964.08 1060.79,965.52 1276.33,973.07 975.49,980.64 1132.42,981.14 839.92,987.17 1551.62,988.98 1188.6,989.52 1061.48,997.53 1131.72,1015.12 214.89,1023.93 1199.14,1023.93 1297.56,1023.93 1494.41,1023.93 2183.39,1023.93 2281.82,1023.93 1163.17,1026.46 1354.38,1045.89 1508.67,1065.83 1077.97,1070.06 993.14,1079.37 1192.29,1082.48 1277.23,1090.1 1223.2,1109.38 1023.58,1110.8 1465.33,1118.7 1406.39,1122.17 2232.6,1122.36 2331.03,1122.36 1135.11,1127.31 1045.91,1130.75 1255.97,1142.7 1351.78,1157.71 1549.66,1160.87 1434.99,1170.71 617.19,1180.66 1197.83,1188.91 1324.28,1205.62 1548.49,1207.47 1453.64,1212.33 510.16,1220.78 608.59,1220.78 1395.99,1220.78 2183.39,1220.78 2281.82,1220.78 204.89,1230.78 455.26,1233.87 1352.6,1239.77 647.55,1246.3 1255.42,1246.55 694.68,1249.48 1447.96,1255.87 1167,1266.2 1540.67,1272.02 45.74,1272.72 1281.22,1273.82 1385.4,1273.48 1200,1288.33 1452.98,1289.95 1311.65,1301.44 1407.43,1307.64 1232.69,1318.9 1543.63,1319.21 2232.6,1319.21 2331.03,1319.21 1800.57,1329.32 1340.97,1336.85 1408.78,1342.24 1550.64,1347.11 1258.11,1348.26 1449.69,1354.41 1767.47,1360.61 1340.97,1369.58 1410.12,1381.34 1275.18,1382.47 1739.36,1394.16 33.23,1403.5 1340.97,1413.31 2183.39,1417.63 2281.82,1417.63 1547.09,1448.84 1275.31,1457.03 1340.97,1457.03 1544.88,1496.54 2232.6,1516.06 2331.03,1516.06 214.89,1614.48 313.31,1614.48 411.74,1614.48 510.16,1614.48 608.59,1614.48 707.01,1614.48 2183.39,1614.48 2281.82,1614.48 44.61,1650.28 1198.84,1708.57 460.95,1712.91 559.37,1712.91 2232.6,1712.91 2331.03,1712.91 1244.84,1755.57 45.74,1766.28 1198.84,1801.57 510.16,1811.33 608.59,1811.33 2183.39,1811.33 2281.82,1811.33 46.88,1840.2 1478.19,1863.38 559.37,1909.76 2232.6,1909.76 2331.03,1909.76 313.31,2008.18 411.74,2008.18 608.59,2008.18 2183.39,2008.18 2281.82,2008.18 1937.33,2106.61 2232.6,2106.61 2331.03,2106.61 1749.12,2186.79 214.89,2205.03 313.31,2205.03 2281.82,2205.03 1114.17,2215.7 1715.28,2218.07 1750.15,2221.66 657.8,2303.46 756.22,2303.46 2232.6,2303.46 2331.03,2303.46 866.64,2359.32 845.94,2382.56 1368.98,2386.13 1455.45,2386.65 1682.42,2388.71 1733.89,2388.71 1151.73,2389.41 1852.41,2389.35 1896.16,2390.91 313.31,2401.89 707.01,2401.89 1100.71,2401.89 2183.39,2401.89 2281.82,2401.89 1214.02,2403.94 921.58,2408.36 1931.7,2412 849.65,2417.94 1235.48,2446.86 921.88,2449.12 851.51,2462.2 1294.31,2464.16 1470.93,2464.77 1542.13,2464.77 1734.64,2497.85 2232.6,2500.31 2331.03,2500.31 1744.07,2546.4 116.46,2598.74 214.89,2598.74 1199.14,2598.74 1888.11,2598.74 2183.39,2598.74 2281.82,2598.74 657.8,2697.16 756.22,2697.16 854.65,2697.16 953.08,2697.16 1051.5,2697.16 1149.93,2697.16 1248.35,2697.16 1346.78,2697.16 1445.2,2697.16 1543.63,2697.16 1642.05,2697.16 1740.48,2697.16 2134.18,2697.16 2232.6,2697.16 2331.03,2697.16 116.46,2795.59 313.31,2795.59 411.74,2795.59 510.16,2795.59 805.44,2795.59 903.86,2795.59 1002.29,2795.59 1199.14,2795.59 1297.56,2795.59 1494.41,2795.59 1592.84,2795.59 1789.69,2795.59 1888.11,2795.59 1986.54,2795.59 2084.96,2795.59 2183.39,2795.59 2281.82,2795.59
KEY: P1.3 R24.1 S2.1 | length 3783.7
  Top Layer w7: P1.3 103.48,1825.5 103.48,268.66 309.96,62.18 1789.61,62.18 1834.01,106.58 R24.1 1876.58,161.68 1889.77,148.48 S2.1
LED1: LED1.2 P1.21 | length 699.6
  Top Layer w8: P1.21 307.37,1129.4 495.61,1129.4 543.19,1176.98 543.19,1444.62 581.27,1482.71 LED1.2
LED2: LED2.2 P1.23 | length 590.6
  Top Layer w8: P1.23 313.77,1035.8 492.49,1035.8 580.63,1123.94 580.63,1267.43 608.3,1295.1 LED2.2
MDIRN: P1.22 P2.6 U2.34 | length 1931.8
  Top Layer w7: v1@1139.01,1064.54 v1@1140.76,1062.79 ; P2.6 1217.06,821.47 1142.3,821.47 1102.05,861.71 1102.05,1035.87 1128.97,1062.79 v1@1140.76,1062.79 ; U2.34 1324.66,1597.22 1324.66,1580.74 1324.05,1580.14 1324.05,1563.59 1380.01,1507.63 1380.01,1313.83 1143.78,1077.59 1143.78,1063.8 v1@1142.77,1062.79 ; v1@1140.76,1062.79 v1@1142.77,1062.79 ; v1@1140.76,1062.79 v1(1141.76,1061.79) v1@1142.77,1062.79
  Bottom Layer w7: P1.22 402.75,1124.78 722.33,1124.78 822.25,1024.85 1091.04,1024.85 1125.96,1059.77 1139.75,1059.77 v1(1141.76,1061.79)
MDIRP: P1.20 P2.3 U2.33 | length 1918.5
  Top Layer w7: P2.3 1106.09,806.47 1106.09,839.3 1089.05,856.33 1089.05,1041.26 1118.77,1070.98 v1(1118.77,1084.78) ; v1@1116.76,1082.77 v1(1118.77,1084.78) ; U2.33 1309.24,1597.22 1309.24,1580.74 1311.05,1578.93 1311.05,1558.2 1318.67,1550.59 1367.01,1502.25 1367.01,1319.21 1134.58,1086.79 1120.78,1086.79 v1(1118.77,1084.78)
  Bottom Layer w7: P1.20 402.75,1137.78 727.71,1137.78 827.64,1037.85 1085.65,1037.85 1116.76,1068.97 1116.76,1082.77 v1(1118.77,1084.78)
MDITN: P1.18 P2.2 U2.32 | length 1963.9
  Top Layer w7: P2.2 1020.74,747.09 1000.82,747.09 988.77,759.14 988.77,843.9 1033.24,888.37 1033.24,1062.76 1142.48,1172 1156.05,1172 v1(1158.17,1174.13) ; v1@1159.8,1175.76 1159.8,1189.32 1314.82,1344.34 1314.82,1498.8 1291.96,1521.67 1291.96,1579.53 1293.16,1580.74 1293.16,1597.22 U2.32
  Bottom Layer w7: P1.18 367.77,1281.28 408.9,1322.41 719.45,1322.41 880.48,1161.39 1131.87,1161.39 1142.48,1172 1156.05,1172 v1(1158.17,1174.13)
MDITP: P1.16 P2.1 U2.31 | length 1967.4
  Top Layer w7: P2.1 995.9,692.63 995.9,733.63 975.77,753.76 975.77,836.7 975.77,849.29 1020.24,893.76 1020.24,1068.14 1133.29,1181.19 1133.29,1194.76 v1(1135.42,1196.89) ; v1@1137.62,1194.68 v1(1135.42,1196.89) ; v1@1138.67,1200.14 v1(1135.42,1196.89) ; U2.31 1277.75,1597.22 1277.75,1580.74 1278.96,1579.53 1278.96,1516.28 1301.82,1493.42 1301.82,1349.72 1148.98,1196.89 v1(1135.42,1196.89)
  Bottom Layer w7: P1.16 369.29,1381.28 414.47,1336.1 724.14,1336.1 885.86,1174.39 1126.48,1174.39 1133.29,1181.19 1133.29,1194.76 v1(1135.42,1196.89)
NetC12_1: C12.1 F2.2 U1.3 | length 240.6
  Top Layer w30: U1.3 402.45,2488.39 545.54,2488.39 C12.1 F2.2
NetC17_2: C17.2 P2.5 | length 288.8
  Top Layer w20: P2.5 1257.01,733.36 1280.17,733.36 1304.54,757.74 1304.54,904.13 1312.85,912.44 C17.2
NetC18_2: C18.2 P2.4 | length 183.7
  Top Layer w20: v2(1206.7,912.44) C18.2
  Bottom Layer w20: P2.4 1156.09,862.91 1205.62,912.44 v2(1206.7,912.44)
NetLED1_1: LED1.1 R2.2 | length 62.5
  Top Layer w8: R2.2 LED1.1
NetLED2_1: LED2.1 R3.2 | length 62.5
  Top Layer w8: LED2.1 R3.2
NetP2_9: P2.9 R7.2 | length 763
  Top Layer w9: R7.2 889.13,912.44 875.33,898.63 875.33,897.65 797.35,819.67 797.35,362.56 P2.9
NetP2_11: P2.11 R8.2 | length 855.2
  Top Layer w7: P2.11 1342.11,242.31 1391.87,292.07 1476.56,292.07 1558.6,374.11 1558.6,654.28 1455.05,757.83 R8.2
NetP4_A5: P4.A5 R10.2 | length 143
  Top Layer w7: P4.A5 934.13,2490.98 978.85,2446.25 R10.2
NetP4_B5: P4.B5 R11.2 | length 123.9
  Top Layer w7: R11.2@814.83,2446.25 816.02,2447.43 P4.B5
NetP6_A5: P6.A5 R12.2 | length 131.1
  Top Layer w7: P6.A5 1571.28,2510.38 1589.83,2491.83 R12.2
NetP6_B5: P6.B5 R15.2 | length 137.7
  Top Layer w7: R15.2 1429.26,2456.68 1429.26,2470.96 1453.17,2494.87 P6.B5
NetPWR_1: PWR.1 R1.1 | length 72.9
  Top Layer w20: PWR.1 R1.1
NRST: C14.2 P1.14 S1.2 U2.7 | length 2685
  Top Layer w7: S1.2 428.59,154.61 294.71,154.61 165.89,283.43 165.89,1463 223.67,1520.78 319.75,1520.78 P1.14 507.92,1481.28 589.34,1562.7 767.88,1562.7 852.7,1647.51 852.7,1678.83 960.93,1787.06 U2.7 ; S1.2@434.72,161.68 C14.2
PA0: P1.29 U2.14 | length 1397.2
  Top Layer w7: P1.29 300.08,722.11 397.02,722.11 429,754.08 429,851.45 978.32,1400.77 978.32,1648.34 1006.81,1676.83 U2.14
PA1: P1.30 U2.15 | length 1286.4
  Top Layer w7: P1.30 387.08,709.11 402.4,709.11 463.88,770.58 463.88,867.95 991.32,1395.39 991.32,1635.55 1016.84,1661.08 U2.15
PA2: P1.31 U2.16 | length 1476.9
  Top Layer w7: P1.31 309.96,631.99 438.69,631.99 485.2,678.5 485.2,870.88 1004.32,1390 1004.32,1630.17 1019.48,1645.33 U2.16
PA3: P1.32 U2.17 | length 1388.7
  Top Layer w7: P1.32 363.39,581.28 386,603.89 464.85,603.89 520.08,659.12 520.08,887.38 1017.32,1384.62 1017.32,1620.14 1026.59,1629.42 1041.89,1629.42 U2.17
PA4: P1.33 U2.19 | length 1559.3
  Top Layer w7: P1.33 308.22,530.25 478.41,530.25 546.24,598.08 546.24,895.16 1079.61,1428.53 1079.61,1569.44 1088.61,1578.43 U2.19
PA5: P1.34 U2.20 | length 1493.1
  Top Layer w7: P1.34 475.96,481.28 574.59,579.91 574.59,905.12 1092.61,1423.15 1092.61,1564.05 1104.35,1575.79 U2.20
PA6: P1.35 U2.21 | length 1651.8
  Top Layer w7: P1.35 315.2,437.22 450.29,437.22 596.32,583.25 596.32,908.46 1105.61,1417.76 1105.61,1558.67 1120.1,1573.16 U2.21
PA7: P1.36 U2.22 | length 1569.1
  Top Layer w7: P1.36 412.73,381.28 613.97,582.52 613.97,907.73 1118.61,1412.38 1118.61,1553.29 1135.85,1570.52 U2.22
PA8: P5.25 U2.43 | length 1249.4
  Top Layer w7: U2.43 1538.33,1755.57 1669.72,1624.17 1669.72,1214.51 P5.25
PA9: P3.2 P5.24 U2.44 | length 2775
  Top Layer w7: U2.44 1596.33,1771.32 v1(1619.1,1748.54) 1683.15,1748.54 1819.68,1885.08 1819.68,2670.8 1835.76,2686.87 2050.29,2686.87 P3.2
  Bottom Layer w7: v1(1619.1,1748.54) 1619.1,1216.81 1896.06,939.85 2061.52,939.85 P5.24
PA10: P3.1 P5.23 U2.45 | length 2466.5
  Top Layer w7: U2.45 1631.04,1787.06 1640.65,1796.68 v1(1643.64,1796.68) 1785.39,1938.43 1785.39,2654.88 1870.04,2739.53 P3.1
  Bottom Layer w7: v1(1643.64,1796.68) 1643.64,1271.07 1933.43,981.28 P5.23
PA11: P5.22 P6.A7 P6.B7 U2.46 | length 2306.5
  Top Layer w7: U2.46 1355.79,1802.98 1372.27,1802.98 1373.48,1804.19 1556,1804.19 1593.49,1841.68 1607.8,1841.68 v1(1609.12,1843) ; P6.A7 1509.82,2567.3 1509.82,2531.78 1508.89,2530.84 1508.89,2520.49 ; P6.B7 1551.6,2527.78 1544.31,2520.49 1517.46,2520.49 ; v1@1609.12,1843.87 1611.31,1846.06 1611.31,1859.5 1643.06,1891.24 1643.06,2263.14 1508.89,2397.31 1508.89,2511.92 ; 1508.89,2511.92 1508.89,2520.49 ; 1508.89,2511.92 1517.46,2520.49 ; 1508.89,2520.49 1517.46,2520.49
  Bottom Layer w7: v1(1609.12,1843) 1609.99,1843.87 1646.48,1843.87 1689.84,1800.51 1689.84,1304.85 1960.89,1033.8 2055.47,1033.8 P5.22
PA12: P5.21 P6.A6 P6.B6 U2.47 | length 2157.6
  Top Layer w7: U2.47 1355.79,1818.39 1372.27,1818.39 1373.48,1817.19 1550.61,1817.19 1584.3,1850.87 1584.3,1864.3 v1(1586.49,1866.5) 1588.68,1868.69 1602.12,1868.69 1630.06,1896.63 1630.06,2257.76 1495.89,2391.93 1495.89,2530.84 1494.95,2531.78 1494.95,2567.3 P6.B6 1492.54,2608.01 1498.68,2614.15 1526.28,2614.15 1531.91,2608.51 P6.A6
  Bottom Layer w7: v1(1586.49,1866.5) 1642.24,1866.5 1702.84,1805.9 1702.84,1381.39 P5.21
PA13: P3.6 P5.20 U2.48 | length 2786.6
  Top Layer w7: v1(1312.01,2386.59) 1312.01,2355.24 1531.16,2136.08 1531.16,2013.95 v1(1530.33,2013.12) 1531.16,2012.28 1531.16,1862.71 1502.76,1834.31 U2.48
  Bottom Layer w7: v1(1312.01,2386.59) 1347.96,2422.54 1865.88,2422.54 1939.19,2495.86 2059.28,2495.86 P3.6 ; v1(1530.33,2013.12) 1563.46,2013.12 1755.33,1821.25 1755.33,1458.54 1983.09,1230.78 2053.45,1230.78 P5.20
PA14: P3.4 P5.19 U2.52 | length 2804.7
  Top Layer w7: v1(1278.76,2403.58) 1278.76,2341.83 1441.19,2179.39 1441.19,2028.81 1388.41,1976.03 v1@1357.41,1976.03 ; U2.52 1324.83,1958.46 1340.87,1974.51 1356.13,1974.51 v1(1357.41,1975.79)
  Bottom Layer w7: v1(1278.76,2403.58) 1281.6,2403.58 1313.56,2435.54 1860.49,2435.54 1895.7,2470.76 1895.7,2554.18 1937.05,2595.53 2058.95,2595.53 P3.4 ; v1(1357.41,1975.79) 1429.33,1975.79 1440.68,1987.13 1560.24,1987.13 1736.48,1810.89 1736.48,1439.27 1994.48,1181.28 P5.19
PA15: P5.18 U2.53 | length 1385.2
  Top Layer w7: U2.53 1309.08,1965.65 1347.29,2003.86 1376.21,2003.86 v1(1376.77,2003.3)
  Bottom Layer w7: v1(1376.77,2003.3) 1430.88,2003.3 1474.06,2046.48 1548.48,2046.48 1775.34,1819.62 1775.34,1497.86 1944.98,1328.21 2056.02,1328.21 P5.18
PB0: P5.34 U2.25 | length 3092.7
  Top Layer w7: U2.25 1183.09,1562.61 1158.42,1537.94 1158.42,1397.03 729.88,968.49 729.88,253.39 842.82,140.46 1475.3,140.46 1769.46,434.62 2056.3,434.62 P5.34
PB1: P5.33 U2.26 | length 2967
  Top Layer w7: U2.26 1198.84,1559.97 1171.42,1532.55 1171.42,1391.64 742.88,963.1 742.88,258.78 848.2,153.46 1469.91,153.46 1797.73,481.28 P5.33
PB2: P5.32 U2.27 | length 3082.6
  Top Layer w7: U2.27 1214.59,1557.34 1184.42,1527.17 1184.42,1386.26 755.88,957.72 755.88,264.16 853.59,166.46 1464.53,166.46 1831.52,533.45 2055.12,533.45 P5.32
PB3: P5.12 U2.58 | length 1430.4
  Top Layer w7: U2.58 1230.34,2011.72 1273.3,2054.68 1273.3,2074.73 v1(1300.25,2101.69)
  Bottom Layer w7: v1(1300.25,2101.69) 1326.24,2127.68 1577.59,2127.68 1853.34,1851.93 1853.34,1707.49 1929.63,1631.19 1929.63,1558.19 1962.48,1525.35 2047.02,1525.35 P5.12
PB4: P5.11 U2.59 | length 1279.6
  Top Layer w7: U2.59 1214.59,2014.36 1260.3,2060.07 1260.3,2097.64 v1(1262.64,2099.98)
  Bottom Layer w7: v1(1262.64,2099.98) 1303.34,2140.68 1582.98,2140.68 1866.34,1857.32 1866.34,1712.87 1997.93,1581.28 P5.11
PB5: P5.10 U2.60 | length 1410.9
  Top Layer w7: U2.60 1198.84,2019.62 1236.8,2057.58 v1(1236.8,2081.1)
  Bottom Layer w7: v1(1236.8,2081.1) 1236.53,2081.37 1236.53,2107.1 1283.11,2153.68 1588.36,2153.68 1879.34,1862.7 1879.34,1725.8 1972.34,1632.79 2054.47,1632.79 P5.10
PB6: P4.A7 P4.B7 P5.9 U2.61 | length 2071.2
  Top Layer w7: P4.A7 875.07,2516.68 885.16,2506.58 ; P4.B7 914.44,2523.36 897.66,2506.58 ; U2.61 1182.93,1913.92 1182.93,1930.4 1181.72,1931.6 1181.72,2090.92 1191.22,2100.42 v1(1191.22,2103.53) 1191.22,2106.63 1181.72,2116.13 1181.72,2213.22 1153.9,2241.03 1149.45,2245.48 1135.13,2259.8 1027.13,2259.8 891.41,2395.52 891.41,2500.33 ; 885.16,2506.58 891.41,2500.33 ; 885.16,2506.58 897.66,2506.58 ; 891.41,2500.33 897.66,2506.58
  Bottom Layer w7: v1(1191.22,2103.53) 1191.22,2106.63 1181.72,2116.13 1181.72,2140.76 1215.16,2174.2 1586.22,2174.2 1915.68,1844.74 1915.68,1768.55 P5.9
PB7: P4.A6 P4.B6 P5.8 U2.62 | length 2246.3
  Top Layer w7: P4.A6 894.76,2615.81 889.11,2621.46 860.32,2621.46 855.39,2616.52 P4.B6 855.39,2517.98 878.41,2494.95 878.41,2390.13 1021.74,2246.8 1129.75,2246.8 1168.72,2207.83 1168.72,2116.13 1159.22,2106.63 v1(1159.22,2103.53) 1159.22,2100.42 1168.72,2090.92 1168.72,1931.6 1167.51,1930.4 1167.51,1913.92 U2.62
  Bottom Layer w7: v1(1159.22,2103.53) 1159.22,2106.63 1168.72,2116.13 1168.72,2146.15 1209.77,2187.2 1591.61,2187.2 1933.73,1845.08 1933.73,1768.89 1971.59,1731.02 2052.7,1731.02 P5.8
PB8: P5.7 U2.64 | length 1317.5
  Top Layer w7: v1(1126.19,1968.33) 1128.24,1966.28 1128.24,1951.43 1135.85,1943.82 U2.64
  Bottom Layer w7: v1(1126.19,1968.33) 1126.19,2147.51 1178.88,2200.2 1596.99,2200.2 2002.95,1794.24 P5.7
PB9: P5.6 U2.65 | length 1438.1
  Top Layer w7: v1(1102.69,1995.06) 1102.69,1958.6 1120.1,1941.19 U2.65
  Bottom Layer w7: v1(1102.69,1995.06) 1102.69,2142.39 1173.5,2213.2 1612.53,2213.2 1986.91,1838.82 2060.49,1838.82 P5.6
PB10: P5.29 U2.42 | length 1440.2
  Top Layer w7: U2.42 1535.69,1739.82 1656.72,1618.79 1656.72,1141.74 v1(1922.83,875.63)
  Bottom Layer w7: v1(1922.83,875.63) 1922.83,825.92 1913.13,816.22 1913.13,771.1 P5.29
PB11: P5.31 U2.41 | length 1532.4
  Top Layer w7: U2.41 1533.05,1724.07 1643.72,1613.4 1643.72,1116.25 v1(1890,869.97)
  Bottom Layer w7: v1(1890,869.97) 1868.86,848.84 1868.86,715.37 P5.31
PB12: P5.30 U2.37 | length 1529.3
  Top Layer w7: U2.37 1522.51,1661.08 1584.15,1599.43 1584.15,1023.72 1973.46,634.41 2056.08,634.41 P5.30
PB13: P5.28 U2.38 | length 1486.8
  Top Layer w7: U2.38 1525.14,1676.83 1599.94,1602.03 1599.94,1045.58 1915.61,729.9 2051.58,729.9 P5.28
PB14: P5.27 U2.39 | length 1341.3
  Top Layer w7: U2.39 1527.78,1692.58 1617.44,1602.91 1617.44,1062.62 1898.78,781.28 P5.27
PB15: P5.26 U2.40 | length 1436.6
  Top Layer w7: U2.40 1530.42,1708.32 1630.72,1608.02 1630.72,1078.88 1872.61,836.99 2058.66,836.99 P5.26
PC0: P1.25 U2.8 | length 1334.1
  Top Layer w7: P1.25 309.06,931.09 435.09,931.09 749.64,1245.63 749.64,1526.06 865.7,1642.13 865.7,1673.45 963.57,1771.32 U2.8
PC1: P1.26 U2.9 | length 1227.6
  Top Layer w7: P1.26 396.06,918.09 440.48,918.09 762.64,1240.25 762.64,1520.68 878.7,1636.75 878.7,1668.06 966.21,1755.57 U2.9
PC2: P1.27 U2.10 | length 1362.5
  Top Layer w7: P1.27 308.6,830.62 371.4,830.62 775.64,1234.86 775.64,1515.3 892.61,1632.27 892.61,1663.58 968.84,1739.82 U2.10
PC3: P1.28 U2.11 | length 1267
  Top Layer w7: P1.28 416,838.02 416,856.84 788.64,1229.48 788.64,1509.91 905.61,1626.88 905.61,1658.2 971.48,1724.07 U2.11
PC4: P5.36 U2.23 | length 3102.9
  Top Layer w7: U2.23 1151.6,1567.88 1131.61,1547.9 1131.61,1406.99 703.88,979.26 703.88,242.62 832.05,114.46 1486.06,114.46 1690.7,319.09 2040.77,319.09 P5.36
PC5: P5.35 U2.24 | length 2977.1
  Top Layer w7: U2.24 1167.35,1565.25 1144.61,1542.52 1144.61,1401.61 716.88,973.87 716.88,248.01 837.43,127.46 1480.68,127.46 1734.5,381.28 P5.35
PC10: P5.14 U2.54 | length 1355.6
  Top Layer w7: U2.54 1293.33,1986.32 1326.49,2019.48 v1(1326.61,2019.48)
  Bottom Layer w7: v1(1326.61,2019.48) 1326.61,2019.6 1352.37,2045.36 1436.17,2045.36 1440.45,2049.64 1463.29,2072.48 1559.25,2072.48 1582.09,2049.64 1801.34,1830.39 1801.34,1565.83 1931.53,1435.63 2057.31,1435.63 P5.14
PC11: P5.13 U2.55 | length 1242.5
  Top Layer w7: U2.55 1277.58,2003.81 1319.63,2045.86 1375.22,2045.86 v1(1398.22,2068.86)
  Bottom Layer w7: v1(1398.22,2068.86) 1414.84,2085.48 1564.64,2085.48 1814.34,1835.78 1814.34,1591.8 1924.86,1481.28 P5.13
PC12: P5.16 U2.56 | length 1531.4
  Top Layer w7: U2.56 1261.83,2006.45 1331.32,2075.93 1360.29,2075.93 v1(1360.62,2075.6) ; v1(1894.42,1571.08) 1894.42,1389.01 1946.19,1337.23 2058.9,1337.23 P5.16
  Bottom Layer w7: v1(1360.62,2075.6) 1383.5,2098.48 1570.02,2098.48 1827.34,1841.16 1827.34,1638.16 v1(1894.42,1571.08)
PC13: P5.15 U2.2 | length 1616.2
  Top Layer w7: v1(985.75,1882.43) 1002.38,1865.8 U2.2
  Bottom Layer w7: v1(985.75,1882.43) 985.75,1905.29 1021.72,1941.26 1281.62,1941.26 1350.11,2009.75 1350.11,2009.87 1372.6,2032.36 1441.56,2032.36 1445.84,2036.64 1468.68,2059.48 1553.87,2059.48 1576.71,2036.64 1788.34,1825.01 1788.34,1538.12 1945.18,1381.28 P5.15
PD2: P5.17 U2.57 | length 1531.9
  Top Layer w7: U2.57 1246.09,2009.08 1325.32,2088.31 1325.76,2088.31 1341.62,2104.18 v1(1346.22,2104.18) ; v1(1860.64,1657.92) 1860.64,1325.46 1904.82,1281.28 P5.17
  Bottom Layer w7: v1(1346.22,2104.18) 1350.82,2104.18 1358.13,2111.48 1575.4,2111.48 1840.34,1846.55 1840.34,1678.22 v1(1860.64,1657.92)
PE0: P5.5 U2.66 | length 1340.9
  Top Layer w7: v1(1075,1978.77) 1078.26,1975.52 1078.26,1966.82 1078.48,1966.59 1078.48,1964.43 1104.35,1938.55 U2.66
  Bottom Layer w7: v1(1075,1978.77) 1075,2133.09 1168.11,2226.2 1658.03,2226.2 P5.5
VBAT: C4.2 P5.4 R9.2 U2.1 | length 2177.8
  Top Layer w7: C4.2@986.42,1956.33 1017.4,1925.35 1017.4,1885.65 1021.5,1881.55 U2.1
  Top Layer w20: R9.2@848.8,2107.15 890.84,2065.12 890.84,2019.67 909.4,2001.11 974.71,2001.11 986.42,1989.4 C4.2
  Top Layer w30: v2(839.21,2136.97) 866.84,2136.97 v2(871.67,2132.14) ; R9.2 848.8,2109.12 857.58,2117.9 857.58,2120.06 v2@869.67,2132.14
  Bottom Layer w30: v2(839.21,2136.97) v2@844.79,2136.97 ; P5.4 2174.68,2053 2174.68,2170.07 2089.93,2254.82 1927.48,2254.82 1903.49,2278.81 1880.77,2301.52 977.65,2301.52 871.67,2195.54 871.67,2163.84 ; v2@844.79,2136.97 871.67,2163.84 ; v2@844.79,2136.97 866.84,2136.97 v2(871.67,2132.14) 871.67,2163.84
VDD_ETH: C20.2 R4.1 U2.35 | length 405.3
  Top Layer w8: U2.35 U2.35@1367.31,1629.58 ; 1396.4,1603.91 1396.4,1600.49 ; C20.2@1417.7,1503.62 1401.71,1519.61 ; C20.2 1434.44,1497.7 1401.71,1530.43 ; U2.35@1367.31,1629.58 1376.88,1629.58 1401.71,1604.76 1401.71,1530.43 ; U2.35@1367.31,1629.58 1396.4,1600.49 ; 1396.4,1600.49 1396.4,1524.92 1401.71,1519.61 ; 1401.71,1519.61 1401.71,1530.43
  Top Layer w30: R4.1 C20.2
VDDA: C10.1 P5.2 R6.2 U2.13 | length 2370
  Top Layer w7: C10.1@951.84,1546.74 944.92,1553.65 944.92,1643.5 994,1692.58 U2.13
  Top Layer w20: R6.2 v1(944.92,1499.94) C10.1
  Bottom Layer w20: v1(944.92,1499.94) 876.14,1499.94 856.79,1519.29 856.79,2056.52 1060.2,2259.93 1859.77,2259.93 1895.88,2223.82 2031.52,2223.82 2102.95,2152.38 P5.2
VDDK: C16.2 U2.30 | length 112.6
  Top Layer w7: C16.2 1239.21,1521.63 1261.83,1544.25 U2.30
X32KI: C5.1 U2.3 Y2.1 | length 399.7
  Top Layer w7: C5.1 728.38,2011.87 Y2.1 877.59,1951.09 877.59,1922.43 949.96,1850.06 U2.3
X32KO: C6.1 U2.4 Y2.2 | length 354.3
  Top Layer w7: C6.1 734.81,1920.44 809.81,1920.44 819.11,1911.14 870.49,1911.14 947.32,1834.31 U2.4
XI: C7.2 U2.5 Y1.1 | length 410.2
  Top Layer w7: C7.2 679.2,1797.51 701.74,1820.05 Y1.1 746.85,1823.99 784.01,1861.15 854.95,1861.15 897.53,1818.56 U2.5
XO: C8.2 U2.6 Y1.3 | length 312.3
  Top Layer w7: C8.2 Y1.3@806.53,1718.31 ; Y1.3 821.66,1733.44 891.03,1802.81 U2.6
pads on no net: P2. P2.7 P4.A8 P4.B8 P6.A8 P6.B8 S3.0 S3.2 U1.

## Polygon pours and split planes (outlines as drawn)
GND on Bottom Layer "GND" (hatched Horizontal grid 8 track 8, remove dead copper, pour order 1): 0,0 0,2874.02 2362.2,2874.02 2362.2,0 2283.46,0
GND on Top Layer "GND" (hatched Horizontal grid 8 track 8, remove dead copper, pour order 0): 0,2795.28 0,2874.02 2362.2,2874.02 2362.2,0 0,0 0,78.74

## Keep-outs
Keep-Out Layer:
  the board outline again, w10

## Other copper
Bottom Layer:
  rectangle net GND: 1110.13,1672.66 1288.22,1838.39

## Silkscreen, mask and mechanical layers (free items; w line width, h text height)
Top Overlay:
  text "RX1" at 1827.77,2715.49 h35
  text "TX1" at 2174.98,2715.49 h35
  text "GND" at 1816.11,2615.38 h35
  text "SWCLK" at 2174.98,2615.38 h35
  text "ON" at 292.23,2586.38 h35
  text "OFF" at 408.34,2586.38 h35
  text "GND" at 1816.11,2515.27 h35
  text "SWDIO" at 2174.98,2515.27 h35
  text "3V3" at 1816.11,2415.16 h35
  text "GND" at 2174.98,2415.16 h35
  text "3V3" at 1816.11,2315.05 h35
  text "3V3" at 2174.98,2315.05 h35
  text "GND" at 1823.11,2067.08 h35
  text "VDDA" at 2181.98,2067.08 h35
  text "3V3" at 89.15,2064.58 h35
  text "3V3" at 435.69,2064.58 h35
  text "GND" at 1823.11,1966.98 h35
  text "VBAT" at 2181.98,1966.98 h35
  text "KEY" at 89.15,1964.7 h35
  text "BOOT0" at 435.69,1964.7 h35
  text "PE0" at 1823.11,1866.87 h35
  text "PB9" at 2181.98,1866.87 h35
  text "GND" at 89.15,1864.83 h35
  text "GND" at 435.69,1864.83 h35
  text "PB8" at 1823.11,1766.76 h35
  text "PB7" at 2181.98,1766.76 h35
  text "GND" at 89.15,1764.95 h35
  text "3V3" at 435.69,1764.95 h35
  text "PB6" at 1823.11,1666.66 h35
  text "PB5" at 2181.98,1666.66 h35
  text "GND" at 89.15,1665.07 h35
  text "3V3" at 435.69,1665.07 h35
  text "PB4" at 1823.11,1566.55 h35
  text "PB3" at 2181.98,1566.55 h35
  text "ELED0" at 19.17,1565.19 h35
  text "3V3" at 435.69,1565.19 h35
  text "PC11" at 1805.61,1466.45 h35
  text "PC10" at 2181.98,1466.45 h35
  text "ELED1" at 30.83,1465.31 h35
  text "NRST" at 435.69,1465.31 h35
  text "PC13" at 1793.95,1366.34 h35
  text "PC12" at 2181.98,1366.34 h35
  text "+5V" at 89.15,1365.44 h35
  text "MDITP" at 435.69,1365.44 h35
  text "PD2" at 1823.11,1266.23 h35
  text "PA15" at 2181.98,1266.23 h35
  text "+5V" at 89.15,1265.56 h35
  text "MDITN" at 435.69,1265.56 h35
  text "CH32V317W-R0-1v0" at 901.65,1196.96 h35
  text "+5V" at 89.15,1165.68 h35
  text "MDIRP" at 435.69,1165.68 h35
  text "PA14" at 1793.95,1166.13 h35
  text "PA13" at 2181.98,1166.13 h35
  text "LED1" at 65.82,1065.8 h35
  text "MDIRN" at 435.69,1065.8 h35
  text "PA12" at 1793.95,1066.02 h35
  text "PA11" at 2181.98,1066.02 h35
  text "LED2" at 54.16,965.93 h35
  text "GND" at 435.69,965.93 h35
  text "PA10" at 1793.95,965.92 h35
  text "PA9" at 2181.98,965.92 h35
  text "PC0" at 89.15,866.05 h35
  text "PC1" at 435.69,866.05 h35
  text "PA8" at 1823.11,865.81 h35
  text "PB15" at 2181.98,865.81 h35
  text "PC2" at 89.15,766.17 h35
  text "PC3" at 435.69,766.17 h35
  text "PB14" at 1793.95,765.71 h35
  text "PB13" at 2181.98,765.71 h35
  text "PA0" at 89.15,666.29 h35
  text "PA1" at 435.69,666.29 h35
  text "PB10" at 1793.95,665.6 h35
  text "PB12" at 2181.98,665.6 h35
  text "PA2" at 89.15,566.41 h35
  text "PA3" at 435.69,566.41 h35
  text "PB11" at 1805.61,565.49 h35
  text "PB2" at 2181.98,565.49 h35
  text "PA4" at 89.15,466.54 h35
  text "PA5" at 435.69,466.54 h35
  text "PB1" at 1834.77,465.39 h35
  text "PB0" at 2181.98,465.39 h35
  text "PA6" at 89.15,366.66 h35
  text "PA7" at 435.69,366.66 h35
  text "PC5" at 1823.11,365.28 h35
  text "PC4" at 2181.98,365.28 h35
Mechanical 1:
  the board outline again, w10

## Text inside footprints (layer, text, board x,y; h text height)
LED1: Top Overlay "+" at 734.54,1493.69 h40 r270
LED2: Top Overlay "+" at 734.54,1306.09 h40 r270
PWR: Top Overlay "+" at 646.58,2238.08 h40 r270